# Altium PCB CommandBoard.PcbDoc
Units mm, origin at the board's own origin, x right, y up, seen from the top; angles counter-clockwise.
Board outline 71 x 45 mm, 4 copper layers (Top Layer, Int1 (GND), Int2 (PWR), Bottom Layer), stack 1.369 mm thick; 127 components, 144 nets, 602 pads, 49 vias.
Unrouted connection lines stored in the file: 401.
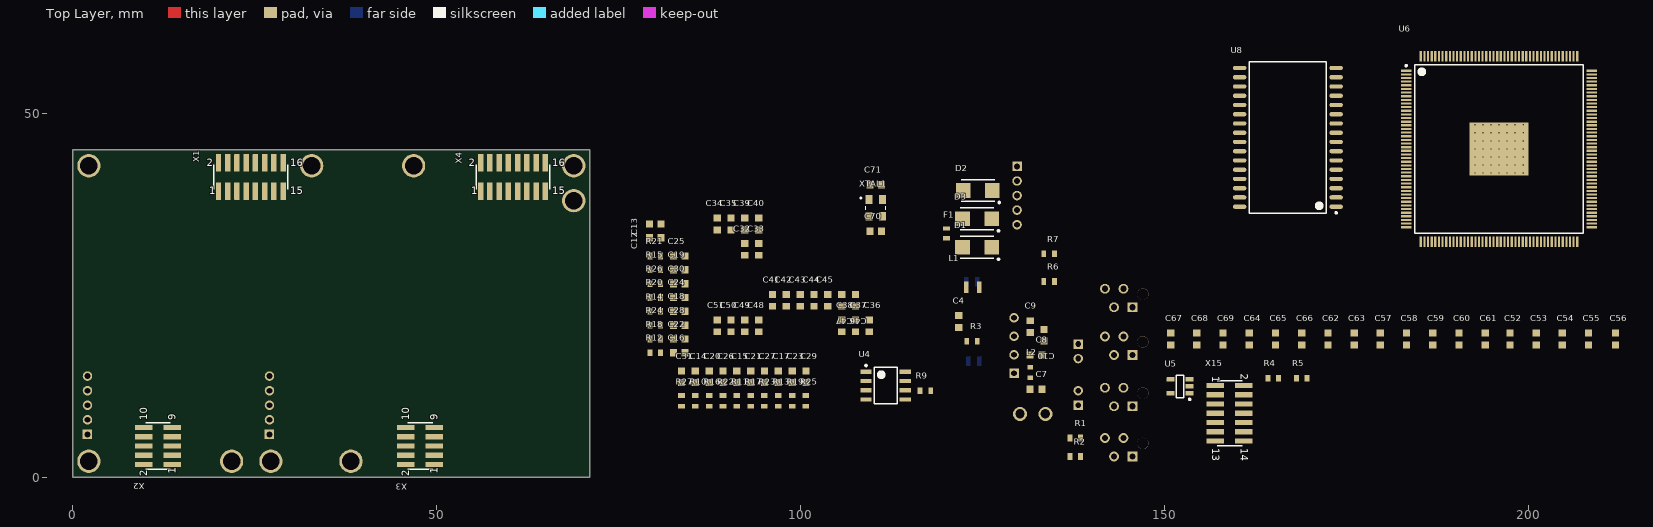
[diagram p0: Top Layer view]
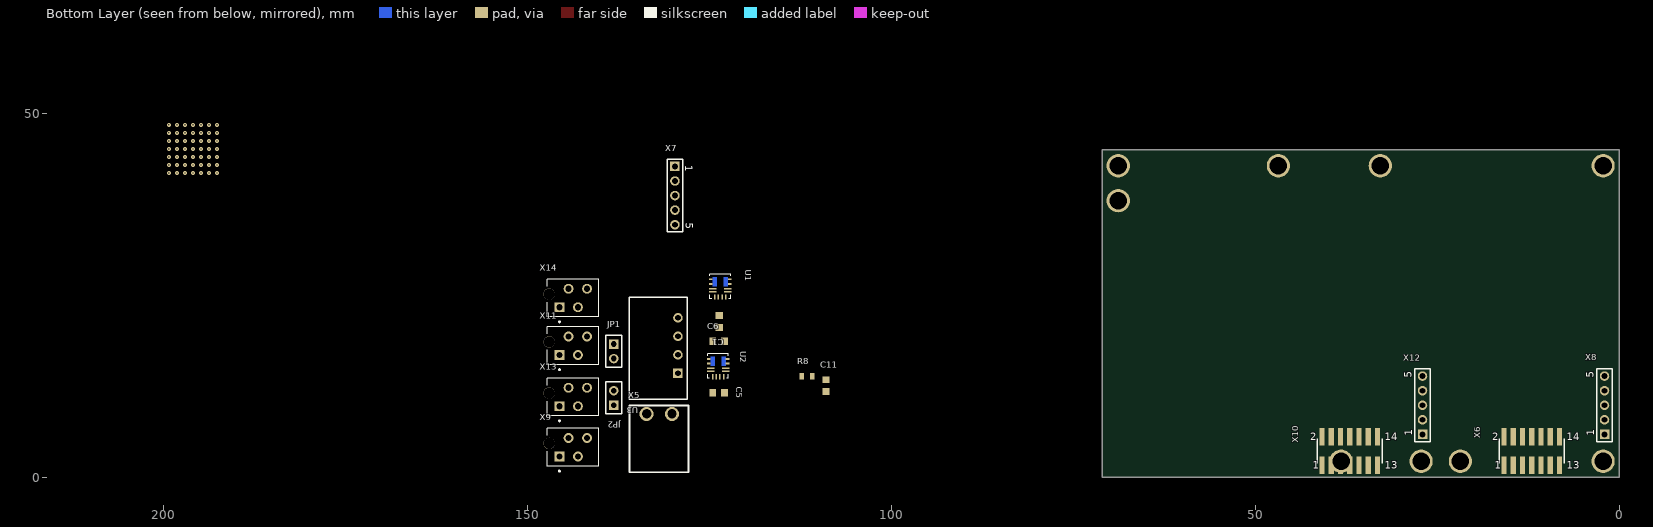
[diagram p1: Bottom Layer view, seen from below]
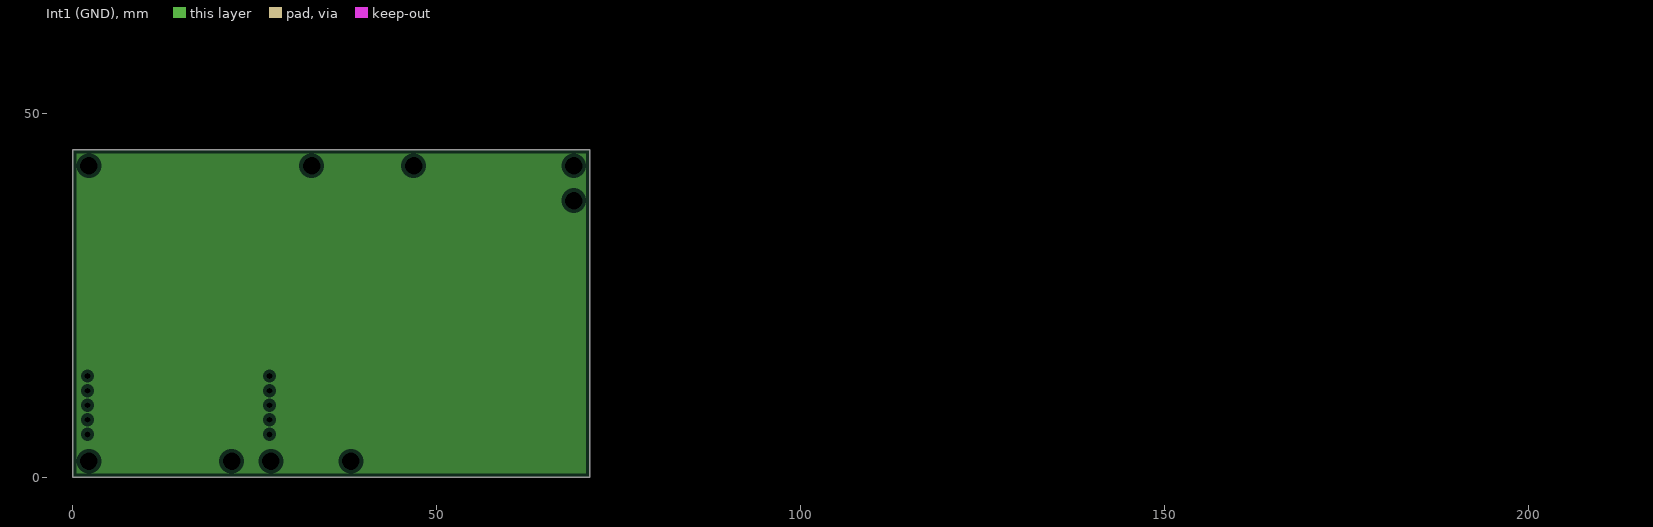
[diagram p2: Int1 (GND), clearances drawn from the general rule]
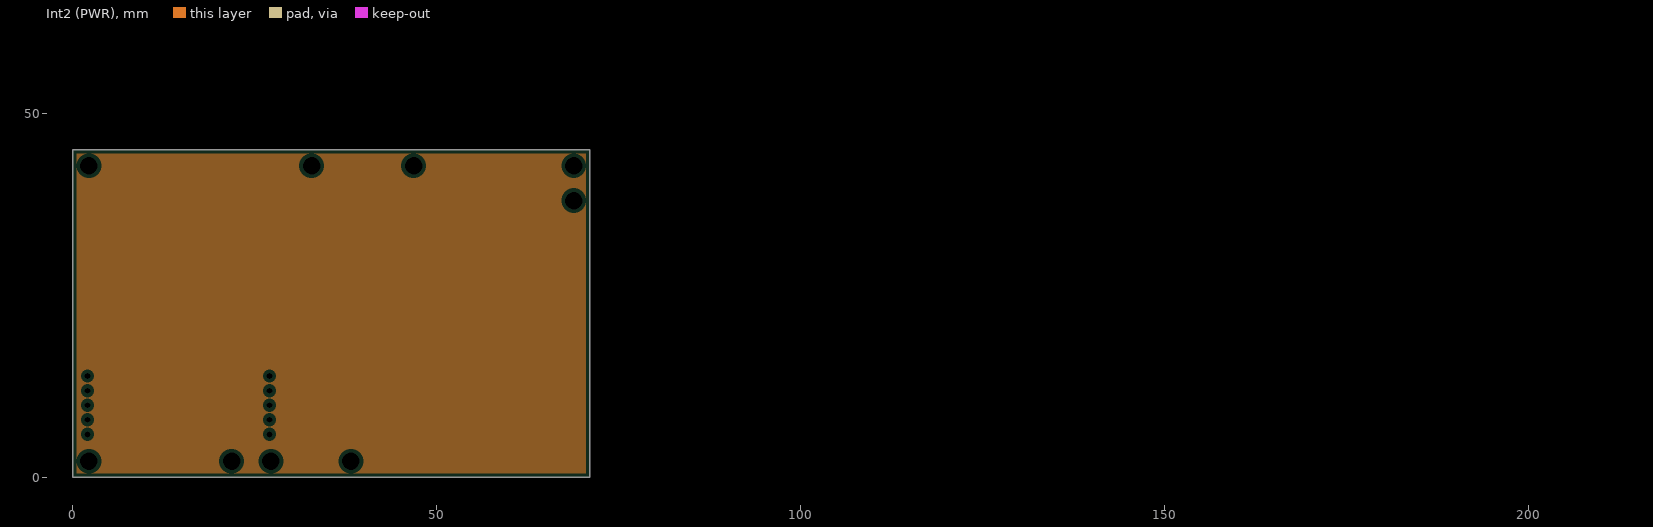
[diagram p3: Int2 (PWR), clearances drawn from the general rule]

## Layer stack, top to bottom
Top Solder: solder mask 0.0254, SM-001, Dk 4
Top Layer: signal copper 0.035
Dielectric 1: prepreg 0.1295, PP-017, Dk 4.3
Dielectric 2: prepreg 0.1295, PP-017, Dk 4.3
Int1 (GND): plane copper 0.035
Dielectric 3: core 0.7112, Core-039, Dk 4.8
Int2 (PWR): plane copper 0.035
Dielectric 4: prepreg 0.1295, PP-017, Dk 4.3
Dielectric 5: prepreg 0.1295, PP-017, Dk 4.3
Bottom Layer: signal copper 0.035
Bottom Solder: solder mask 0.0254, SM-001, Dk 4

## Board outline
0,0 71,0 71,45 0,45

## Design rules (kind name [scope] priority, off if disabled: settings)
Clearance [All] p1: gap=0.2 ignorepadtopadclearanceinfootprint=FALSE except(0: Arc-Hole Track-Hole SMDPad-Hole THPad-Hole Via-Hole Fill-Hole Poly-Hole Region-Hole Text-Hole)
HoleSize [All] p1: absolutevalues=TRUE maxlimit=3.5 minlimit=0.025 maxpercent=80.000 minpercent=20.000
PlaneClearance [All] p1: clearance=0.508
PlaneConnect [All] p1: planeconnectstyle=Relief reliefexpansion=0.508 reliefentries=4 reliefconductorwidth=0.254 reliefairgap=0.254
PolygonConnect [All] p1: connectstyle=Relief reliefconductorwidth=0.254 reliefentries=4 polygonreliefangle="90 Angle" airgapwidth=0.254
RoomDefinition Commandboard [InComponentClass('Commandboard')] p1: confinementstyle=ConfineIn formatcopy=TRUE lockcomponents=FALSE outline 0,0 71,0 71,45 0,45
RoomDefinition DSP [InComponentClass('DSP')] p2: confinementstyle=ConfineIn formatcopy=TRUE lockcomponents=FALSE outline 72.098,16.499 135.898,16.499 135.898,21.499 72.098,21.499
RoomDefinition Commandboard_1 [InComponentClass('CommandBoard')] p3: confinementstyle=ConfineIn formatcopy=TRUE lockcomponents=FALSE outline 0,0 71,0 71,45 0,45
RoutingCorners [All] p1: cornerstyle=45-Degree minsetback=2.5 maxsetback=2.5
RoutingVias [All] p1: holewidth=0.25 width=0.65 viastyle="Through Hole" minholewidth=0.25 minwidth=0.6 maxholewidth=1.8 maxwidth=2
SolderMaskExpansion [All] p1: expansion=0.102 istentingtop=FALSE
Width [All] p1: maxlimit=0.5 minlimit=0.15 preferedwidth=0.2
26 further rules are at their usual default settings.

## Classes and differential pairs
component class DSP: C32 C33 C34 C35 C36 C37 C38 C39 C40 C41 C42 C43 C44 C45 C46 C47 C48 C49 C50 C51 C52 C53 C54 C55 C56 C57 C58 C59 C60 C61 C62 C63 C64 C65 C66 C67 C68 C69 C70 C71 U6
component class Commandboard: C1 C4 C5 C6 C7 C8 C9 C10 C11 C12 C13 C14 C15 C16 C17 C18 C19 C20 C21 C22 C23 C24 C25 C26 C27 C28 C29 C30 C31 JP1 JP2 L1 L2 R3 R4 R5 R6 R7 R8 R9 R10 R11 R12 R13 R14 R15 R16 R17 R18 R19 R20 R21 R22 R23 R24 R25 R26 R27 U1 U2 U3 U4 U5 U8 X15 X16 X18 XTAL1

## Components (designator, comment, footprint, x,y, rotation, side; value= is the part's Value field where it differs from the comment)
C1 "CAP CER 10uF 0603" CAPC1608X08N 123.6,21.4 r90 bottom value=10uF
C4 "CAP CER 10uF 0603" CAPC1608X08N 121.7,21.4 r90 top value=10uF
C5 "CAP CER 10uF 0603" CAPC1608X08N 123.7,11.6 r0 bottom value=10uF
C6 "CAP CER 10uF 0603" CAPC1608X08N 123.7,18.7 r0 bottom value=10uF
C7 "CAP CER 4.7uF 0603" CAPC1608X08N 132.3,12.1 r180 top value=4,7uF
C8 "CAP CER 4.7uF 0603" CAPC1608X08N 132.3,16.8 r180 top value=4,7uF
C9 "CAP CER 1uF 0603" CAPC1608X08N 131.5,20.7 r90 top value=1uF
C10 "CAP CER 1nF 0603" CAPC1608X08N 133.4,19.5 r90 top value=1nF
C11 "CAP CER 100nF 0603" CAPC1608X08N 108.95,12.6 r270 bottom value=100nF
C12 "CAP CER 1nF 0603" CAPC1608X08N 80,32.9 r0 top value=24pF
C13 "CAP CER 1nF 0603" CAPC1608X08N 80,34.8 r0 top value=24pF
C14 "CAP CER 4.7nF 0603" CAPC1608X08N 85.5,13.8 r270 top value=4,7nF
C15 "CAP CER 4.7nF 0603" CAPC1608X08N 91.2,13.8 r270 top value=4,7nF
C16 "CAP CER 4.7nF 0603" CAPC1608X08N 83.3,17.1 r180 top value=4,7nF
C17 "CAP CER 4.7nF 0603" CAPC1608X08N 96.9,13.8 r270 top value=4,7nF
C18 "CAP CER 4.7nF 0603" CAPC1608X08N 83.3,22.8 r180 top value=4,7nF
C19 "CAP CER 4.7nF 0603" CAPC1608X08N 83.3,28.5 r180 top value=4,7nF
C20 "CAP CER 4.7nF 0603" CAPC1608X08N 87.4,13.8 r270 top value=4,7nF
C21 "CAP CER 4.7nF 0603" CAPC1608X08N 93.1,13.8 r270 top value=4,7nF
C22 "CAP CER 4.7nF 0603" CAPC1608X08N 83.3,19 r180 top value=4,7nF
C23 "CAP CER 4.7nF 0603" CAPC1608X08N 98.8,13.8 r270 top value=4,7nF
C24 "CAP CER 4.7nF 0603" CAPC1608X08N 83.3,24.7 r180 top value=4,7nF
C25 "CAP CER 4.7nF 0603" CAPC1608X08N 83.3,30.4 r180 top value=4,7nF
C26 "CAP CER 4.7nF 0603" CAPC1608X08N 89.3,13.8 r270 top value=4,7nF
C27 "CAP CER 4.7nF 0603" CAPC1608X08N 95,13.8 r270 top value=4,7nF
C28 "CAP CER 4.7nF 0603" CAPC1608X08N 83.3,20.9 r180 top value=4,7nF
C29 "CAP CER 4.7nF 0603" CAPC1608X08N 100.7,13.8 r270 top value=4,7nF
C30 "CAP CER 4.7nF 0603" CAPC1608X08N 83.3,26.6 r180 top value=4,7nF
C31 "CAP CER 4.7nF 0603" CAPC1608X08N 83.6,13.8 r270 top value=4,7nF
C32 "CAP CER 22uF 0603" CAPC1608X08N 92.3,31.3 r270 top value=22uF
C33 "CAP CER 22uF 0603" CAPC1608X08N 94.2,31.3 r270 top value=22uF
C34 "CAP CER 22uF 0603" CAPC1608X08N 88.5,34.8 r270 top value=22uF
C35 "CAP CER 22uF 0603" CAPC1608X08N 90.4,34.8 r270 top value=22uF
C36 "CAP CER 22uF 0603" CAPC1608X08N 109.4,20.8 r270 top value=22uF
C37 "CAP CER 100nF 0603" CAPC1608X08N 107.5,20.8 r270 top value=100nF
C38 "CAP CER 100nF 0603" CAPC1608X08N 105.6,20.8 r270 top value=100nF
C39 "CAP CER 100nF 0603" CAPC1608X08N 92.3,34.8 r270 top value=100nF
C40 "CAP CER 100nF 0603" CAPC1608X08N 94.2,34.8 r270 top value=100nF
C41 "CAP CER 100nF 0603" CAPC1608X08N 96.1,24.3 r270 top value=100nF
C42 "CAP CER 100nF 0603" CAPC1608X08N 98,24.3 r270 top value=100nF
C43 "CAP CER 22uF 0603" CAPC1608X08N 99.9,24.3 r270 top value=22uF
C44 "CAP CER 22uF 0603" CAPC1608X08N 101.8,24.3 r270 top value=22uF
C45 "CAP CER 22uF 0603" CAPC1608X08N 103.7,24.3 r270 top value=22uF
C46 "CAP CER 22uF 0603" CAPC1608X08N 107.5,24.3 r90 top value=22uF
C47 "CAP CER 22uF 0603" CAPC1608X08N 105.6,24.3 r90 top value=22uF
C48 "CAP CER 22uF 0603" CAPC1608X08N 94.2,20.8 r270 top value=22uF
C49 "CAP CER 22uF 0603" CAPC1608X08N 92.3,20.8 r270 top value=22uF
C50 "CAP CER 22uF 0603" CAPC1608X08N 90.4,20.8 r270 top value=22uF
C51 "CAP CER 22uF 0603" CAPC1608X08N 88.5,20.8 r270 top value=22uF
C52 "CAP CER 100nF 0603" CAPC1608X08N 197.398,18.999 r270 top value=100nF
C53 "CAP CER 100nF 0603" CAPC1608X08N 200.998,18.999 r270 top value=100nF
C54 "CAP CER 100nF 0603" CAPC1608X08N 204.598,18.999 r270 top value=100nF
C55 "CAP CER 100nF 0603" CAPC1608X08N 208.198,18.999 r270 top value=100nF
C56 "CAP CER 100nF 0603" CAPC1608X08N 211.898,18.999 r270 top value=100nF
C57 "CAP CER 100nF 0603" CAPC1608X08N 179.598,18.999 r270 top value=100nF
C58 "CAP CER 100nF 0603" CAPC1608X08N 183.198,18.999 r270 top value=100nF
C59 "CAP CER 100nF 0603" CAPC1608X08N 186.798,18.999 r270 top value=100nF
C60 "CAP CER 100nF 0603" CAPC1608X08N 190.398,18.999 r270 top value=100nF
C61 "CAP CER 100nF 0603" CAPC1608X08N 193.998,18.999 r270 top value=100nF
C62 "CAP CER 22uF 0603" CAPC1608X08N 172.398,18.999 r270 top value=22uF
C63 "CAP CER 22uF 0603" CAPC1608X08N 175.998,18.999 r270 top value=22uF
C64 "CAP CER 100nF 0603" CAPC1608X08N 161.598,18.999 r270 top value=100nF
C65 "CAP CER 100nF 0603" CAPC1608X08N 165.198,18.999 r270 top value=100nF
C66 "CAP CER 100nF 0603" CAPC1608X08N 168.798,18.999 r270 top value=100nF
C67 "CAP CER 100nF 0603" CAPC1608X08N 150.798,18.999 r270 top value=100nF
C68 "CAP CER 100nF 0603" CAPC1608X08N 154.398,18.999 r270 top value=100nF
C69 "CAP CER 100nF 0603" CAPC1608X08N 157.998,18.999 r270 top value=100nF
C70 "CAP CER 100nF 0603" CAPC1608X08N 110.301,33.798 r0 top value=100nF
C71 "CAP CER 100nF 0603" CAPC1608X08N 110.3,40.2 r0 top value=100nF
D1 "DIODE SCHOTTKY 10V 2A SMA" DIOM4326X22N 124.2,31.6 r180 top value=MBRA210LT3G
D2 "DIODE SCHOTTKY 10V 2A SMA" DIOM4326X22N 124.298,39.4 r180 top value=MBRA210LT3G
D3 "DIODE ZENER 6.8V 1W SMA" DIOM4326X22N 124.202,35.5 r180 top value=SMAZ6V8-13-F
F1 "FUSE 1.5A 5V FAST 0603 SMD" FUSEC1508X06N 120,33.5 r270 top value=04000026NR
JP1 "CONNECT 2pos 90°" 62000211121 138.1,17.3 r270 bottom value=WR-TBL322
JP2 "CONNECT 2pos 90°" 62000211121 138.1,10.9 r90 bottom value=WR-TBL322
L1 "IND SMD 470nH 0806" INDC2016X10N 123.6,26.1 r0 top value=470nH
L2 "IND SMD 0603" INDC1608X10N 131.5,14.4 r90 top value=6,8uH
R1 "RES SMD 2K2 0603" RESC1508X04N 137.7,5.4 r180 top value=2k2
R2 "RES SMD 2K2 0603" RESC1508X04N 137.7,2.86 r180 top value=2k2
R3 "RES SMD 0R 0603" RESC1508X04N 123.5,18.7 r0 top value=0R
R4 "RES SMD 100R 0603" RESC1508X04N 164.898,13.599 r180 top value=100R
R5 "RES SMD 4.7k 0603" RESC1508X04N 168.798,13.599 r180 top value=4k7
R6 "RES SMD 4.7k 0603" RESC1508X04N 134.1,26.9 r180 top value=4k7
R7 "RES SMD 2K2 0603" RESC1508X04N 134.1,30.7 r180 top value=2k2
R8 "RES SMD 10R 0603" RESC1508X04N 111.55,13.89 r0 bottom value=10R
R9 "RES SMD 120R 0603" RESC1508X04N 117.1,11.9 r0 top value=120R
R10 "RES 10K SMD 0603" RESC1508X04N 85.5,10.5 r90 top value=10k
R11 "RES 10K SMD 0603" RESC1508X04N 91.2,10.5 r90 top value=10k
R12 "RES 10K SMD 0603" RESC1508X04N 80,17.1 r0 top value=10k
R13 "RES 10K SMD 0603" RESC1508X04N 96.9,10.5 r90 top value=10k
R14 "RES 10K SMD 0603" RESC1508X04N 80,22.8 r0 top value=10k
R15 "RES 10K SMD 0603" RESC1508X04N 80,28.5 r0 top value=10k
R16 "RES 10K SMD 0603" RESC1508X04N 87.4,10.5 r90 top value=10k
R17 "RES 10K SMD 0603" RESC1508X04N 93.1,10.5 r90 top value=10k
R18 "RES 10K SMD 0603" RESC1508X04N 80,19 r0 top value=10k
R19 "RES 10K SMD 0603" RESC1508X04N 98.8,10.5 r90 top value=10k
R20 "RES 10K SMD 0603" RESC1508X04N 80,24.7 r0 top value=10k
R21 "RES 10K SMD 0603" RESC1508X04N 80,30.4 r0 top value=10k
R22 "RES 10K SMD 0603" RESC1508X04N 89.3,10.5 r90 top value=10k
R23 "RES 10K SMD 0603" RESC1508X04N 95,10.5 r90 top value=10k
R24 "RES 10K SMD 0603" RESC1508X04N 80,20.9 r0 top value=10k
R25 "RES 10K SMD 0603" RESC1508X04N 100.7,10.5 r90 top value=10k
R26 "RES 10K SMD 0603" RESC1508X04N 80,26.6 r0 top value=10k
R27 "RES 10K SMD 0603" RESC1508X04N 83.6,10.5 r90 top value=10k
U1 "DC DC CONVERTER 5V-3.3V" QFN2p5x3p0x0p9_MNP 123.475,26.2 r0 bottom value=MPM3805GQB-33-Z
U2 "DC DC CONVERTER 5V-1.2V" QFN2p5x3p0x0p9_MNP 123.765,15.267 r0 bottom value=MPM3805GQB-12-Z
U3 "DC DC CONVERTER 5V-12V" "DCDC CONVERTER" 132,18 r90 bottom value=MEE3S0512SC
U4 "IC TRANSCEIVER CAN" SOIC127P600X175-8N 111.65,12.6 r0 top value=SN65HVD231QDRQ1
U5 "SUPERVISOR 1 CHANNEL" SOT95P280X145-5N 152.098,12.499 r180 top value=ADM823TYRJZ-R7
U6 "DSP TMS320F28388D" TSQFP50P2600X2600X160_HS-177N 195.9,45.1 r0 top value=TMS320F28388D
U8 "RAM SPI" SOP127P1410X300-32N 166.9,46.7 r180 top value=AS6C4008-55INTR
X1 "CONNECT SMD 16pos 180°" 62101621021 24.445,41.25 r0 top locked
X2 "CONNECT SMD 10pos 180°" 62101021021 11.7,4.3 r90 top locked
X3 "CONNECT SMD 10pos 180°" 62101021021 47.7,4.3 r90 top locked
X4 "CONNECT SMD 16pos 180°" 62101621021 60.455,41.25 r0 top locked
X5 "CONNECT 2pos 90°" "WR-TBL322 3.81mm 2p" 130.1,8.7 r180 bottom value=WR-TBL322
X6 "CONNECT SMD 16pos 180°" 62101421021 12,3.6 r180 bottom
X7 "CONNECT SMD 5pos 180°" 62000611121 129.7,37.7 r270 bottom
X8 "CONNECT SMD 5pos 180°" 62000611121 2,10.9 r90 bottom
X9 "CONNECT SMD 4pos 180°" TE_7-215079-4 145.57,2.86 r0 bottom
X10 "CONNECT SMD 16pos 180°" 62101421021 37,3.6 r180 bottom
X11 "CONNECT SMD 4pos 180°" TE_7-215079-4 145.57,16.8 r0 bottom
X12 "CONNECT SMD 5pos 180°" 62000611121 27,10.9 r90 bottom
X13 "CONNECT SMD 4pos 180°" TE_7-215079-4 145.57,9.76 r0 bottom
X14 "CONNECT SMD 4pos 180°" TE_7-215079-4 145.57,23.36 r0 bottom
X15 "CONNECT SMD 7x2pos 180°" 62101421021 158.898,8.799 r270 top
XTAL1 "CRYSTAL 12.0000MHZ" OSCCC320X250X60N 110.3,37 r0 top value=CX3225SB12000

## Footprints (in the part's own frame and the unit in brackets; to place one, negate y for a bottom-side part, rotate by r counter-clockwise, add the part's x,y. Pads: shape width x height; smd on the part's side, far side on the other; paste and mask are expansions set on the pad)
62000211121 [mm] "Pin Header, pitch 2.00 mm, THT, Vertical, single row, 2p"
  rect 1.3x1.3 hole 0.8: 1(-1,0)
  round 1.3 hole 0.8: 2(1,0)
  silkscreen extent -2.2,-1.07 2.2,1.07, body extent -2,-1 2,1, height 6.05
62000611121 [mm] "Pin Header, pitch 2.00 mm, THT, Vertical, single row, 6p"
  rect 1.3x1.3 hole 0.8: 1(-5,0)
  round 1.3 hole 0.8: 2(-3,0) 3(-1,0) 4(1,0) 5(3,0)
  silkscreen extent -6,-1.07 4,1.07, body extent -5.97,-1 4,1, height 6
62101021021 [mm] "Pin Header, pitch 1.27 mm, SMD, Vertical, dual row, 10p"
  rrect10% 0.75x2.4 smd: 1(-2.54,-1.95) 2(-2.54,1.95) 3(-1.27,-1.95) 4(-1.27,1.95) 5(0,-1.95) 6(0,1.95) 7(1.27,-1.95) 8(1.27,1.95) 9(2.54,-1.95) 10(2.54,1.95)
  silkscreen extent -3.17,-1.7 3.17,1.7, body extent -3.17,-2.5 3.18,2.5, height 5.9
62101421021 [mm] "Pin Header, pitch 1.27 mm, SMD, Vertical, dual row, 14p"
  rrect10% 0.75x2.4 smd: 1(-3.81,-1.95) 2(-3.81,1.95) 3(-2.54,-1.95) 4(-2.54,1.95) 5(-1.27,-1.95) 6(-1.27,1.95) 7(0,-1.95) 8(0,1.95) 9(1.27,-1.95) 10(1.27,1.95) 11(2.54,-1.95) 12(2.54,1.95) 13(3.81,-1.95) 14(3.81,1.95)
  silkscreen extent -4.44,-1.7 4.44,1.7, body extent -4.44,-2.5 4.45,2.5, height 5.9
62101621021 [mm] "Pin Header, pitch 1.27 mm, SMD, Vertical, dual row, 16p"
  rrect10% 0.75x2.4 smd: 1(-4.445,-1.95) 2(-4.445,1.95) 3(-3.175,-1.95) 4(-3.175,1.95) 5(-1.905,-1.95) 6(-1.905,1.95) 7(-0.635,-1.95) 8(-0.635,1.95) 9(0.635,-1.95) 10(0.635,1.95) 11(1.905,-1.95) 12(1.905,1.95) 13(3.175,-1.95) 14(3.175,1.95) 15(4.445,-1.95) 16(4.445,1.95)
  silkscreen extent -5.08,-1.7 5.08,1.7, body extent -5.08,-2.5 5.08,2.5, height 5.9
CAPC1608X08N [mm] "Chip Capacitor, 2-Leads, Body 1.60x0.80mm, IPC Medium Density"
  rect 0.95x1 smd: 1(-0.8,0) 2(0.8,0)
  body extent -0.88,-0.48 0.87,0.47, height 0.8
"DCDC CONVERTER" [mm]
  rect 1.3x1.3 hole 0.8: 1(-3.71,-2.71)
  round 1.3 hole 0.8: 2(-1.17,-2.71) 3(1.37,-2.71) 4(3.91,-2.71)
  silkscreen extent -7.25,-4 6.75,4, body extent -7.25,-4.02 6.75,4, height 10.05
DIOM4326X22N [mm] "Molded Diode, 2-Leads, Body 4.31x2.61mm, IPC Medium Density"
  rect 2x2 smd: 1(-2,0) 2(2,0)
  silkscreen extent -3.08,-1.5 2.3,1.77, body extent -2.5,-1.46 2.5,1.46, height 2.2
FUSEC1508X06N [mm] "Chip Resistor, 2-Leads, Body 1.55x0.85mm, IPC Medium Density"
  rect 0.6x1 smd: 1(-0.67,0) 2(0.67,0)
  body extent -0.85,-0.5 0.85,0.5, height 0.58
INDC1608X10N [mm] "Chip Inductor, 2-Leads, Body 1.60x0.80mm, IPC Medium Density"
  rect 0.6x0.8 smd: 1(-0.7,0) 2(0.7,0)
  body extent -0.87,-0.47 0.88,0.48, height 0.95
INDC2016X10N [mm] "Chip Inductor, 2-Leads, Body 2.00x1.60mm, IPC Medium Density"
  rect 0.6x1.6 smd: 1(-0.9,0) 2(0.9,0)
  body extent -1.1,-0.9 1.1,0.9, height 1
OSCCC320X250X60N [mm]
  rect 0.97x1.22 smd: 1(-0.92,1.145) 2(-0.92,-1.145) 3(0.92,-1.145) 4(0.92,1.145)
  silkscreen extent -2.17,-0.22 1.36,1.46
QFN2p5x3p0x0p9_MNP [mil]
  rect 41x8 smd paste+0 mask+0: 1(-40.35,27.57) 2(-40.35,11.81) 7(40.35,11.81) 8(40.35,27.57)
  rect 20x10 smd paste+0 mask+0: 3(-50.87,-13.78) 4(-50.87,-39.38) 5(50.87,-39.38) 6(50.87,-13.78)
  rect 8x28 smd paste+0 mask+0: 9(29.53,57.09) 10(9.85,57.09) 11(-9.85,57.09) 12(-29.54,57.09)
  Top Layer region: 19.21,-50.2 19.21,-2.96 40.87,-2.96 40.87,-50.2
  Top Layer region: -40.87,-50.2 -40.87,-2.96 -19.21,-2.96 -19.21,-50.2
  silkscreen extent -56,-66 56,66, body extent 0,0 10,10, height 10
RESC1508X04N [mm] "Chip Resistor, 2-Leads, Body 1.55x0.80mm, IPC Medium Density"
  rect 0.65x0.9 smd: 1(-0.725,0) 2(0.725,0)
  body extent -0.85,-0.48 0.85,0.47, height 0.45
SOIC127P600X175-8N [mm] "SOIC, 8-Leads, Body 4.91x3.90mm, Pitch 1.27mm, IPC Medium Density"
  rrect10% 1.55x0.6 smd: 1(-2.7,1.905) 2(-2.7,0.635) 3(-2.7,-0.635) 4(-2.7,-1.905) 5(2.7,-1.905) 6(2.7,-0.635) 7(2.7,0.635) 8(2.7,1.905)
  silkscreen extent -2.82,-2.5 1.6,2.88, body extent -3,-2.5 3,2.5, height 1.75
SOP127P1410X300-32N [mm] "SOP, 32-Leads, Body 20.68x11.30mm, Pitch 1.27mm, IPC Medium Density"
  oval 1.85x0.6 smd: 1(-6.625,9.525) 2(-6.625,8.255) 3(-6.625,6.985) 4(-6.625,5.715) 5(-6.625,4.445) 6(-6.625,3.175) 7(-6.625,1.905) 8(-6.625,0.635) 9(-6.625,-0.635) 10(-6.625,-1.905) 11(-6.625,-3.175) 12(-6.625,-4.445) 13(-6.625,-5.715) 14(-6.625,-6.985) 15(-6.625,-8.255) 16(-6.625,-9.525) 17(6.625,-9.525) 18(6.625,-8.255) 19(6.625,-6.985) 20(6.625,-5.715) 21(6.625,-4.445) 22(6.625,-3.175) 23(6.625,-1.905) 24(6.625,-0.635) 25(6.625,0.635) 26(6.625,1.905) 27(6.625,3.175) 28(6.625,4.445) 29(6.625,5.715) 30(6.625,6.985) 31(6.625,8.255) 32(6.625,9.525)
  silkscreen extent -6.75,-10.4 5.3,10.5, body extent -7.05,-10.4 7.05,10.4, height 3
SOT95P280X145-5N [mm] "SOT23, 5-Leads, Body 2.90x2.80mm, Pitch 0.95mm, IPC Medium Density"
  rrect10% 1.1x0.6 smd: 1(-1.3,0.95) 2(-1.3,0) 3(-1.3,-0.95) 4(1.3,-0.95) 5(1.3,0.95)
  silkscreen extent -1.43,-1.55 0.5,1.92, body extent -1.5,-1.53 1.5,1.53, height 1.45
TE_7-215079-4 [mm]
  rect 1.358x1.358 hole 0.85: 1(0,0)
  round 1.358 hole 0.85: 2(-1.27,-2.54) 3(-2.54,0) 4(-3.81,-2.54)
  round 1.55 hole 1.55 unplated: ""(1.4,-1.8)
  silkscreen extent -5.43,-3.87 1.65,2.11, body extent -5.39,-3.77 1.65,1.23, height 4.1
TSQFP50P2600X2600X160_HS-177N [mm] "TSQFP, 176-Leads, Body 24.00x24.00mm, Pitch 0.50mm, Thermal Pad 8.07x7.33mm, IPC Medium Density"
  rrect10% 1.45x0.3 smd: 1(-12.75,10.75) 2(-12.75,10.25) 3(-12.75,9.75) 4(-12.75,9.25) 5(-12.75,8.75) 6(-12.75,8.25) 7(-12.75,7.75) 8(-12.75,7.25) 9(-12.75,6.75) 10(-12.75,6.25) 11(-12.75,5.75) 12(-12.75,5.25) 13(-12.75,4.75) 14(-12.75,4.25) 15(-12.75,3.75) 16(-12.75,3.25) 17(-12.75,2.75) 18(-12.75,2.25) 19(-12.75,1.75) 20(-12.75,1.25) 21(-12.75,0.75) 22(-12.75,0.25) 23(-12.75,-0.25) 24(-12.75,-0.75) 25(-12.75,-1.25) 26(-12.75,-1.75) 27(-12.75,-2.25) 28(-12.75,-2.75) 29(-12.75,-3.25) 30(-12.75,-3.75) 31(-12.75,-4.25) 32(-12.75,-4.75) 33(-12.75,-5.25) 34(-12.75,-5.75) 35(-12.75,-6.25) 36(-12.75,-6.75) 37(-12.75,-7.25) 38(-12.75,-7.75) 39(-12.75,-8.25) 40(-12.75,-8.75) 41(-12.75,-9.25) 42(-12.75,-9.75) 43(-12.75,-10.25) 44(-12.75,-10.75) 89(12.75,-10.75) 90(12.75,-10.25) 91(12.75,-9.75) 92(12.75,-9.25) 93(12.75,-8.75) 94(12.75,-8.25) 95(12.75,-7.75) 96(12.75,-7.25) 97(12.75,-6.75) 98(12.75,-6.25) 99(12.75,-5.75) 100(12.75,-5.25) 101(12.75,-4.75) 102(12.75,-4.25) 103(12.75,-3.75) 104(12.75,-3.25) 105(12.75,-2.75) 106(12.75,-2.25) 107(12.75,-1.75) 108(12.75,-1.25) 109(12.75,-0.75) 110(12.75,-0.25) 111(12.75,0.25) 112(12.75,0.75) 113(12.75,1.25) 114(12.75,1.75) 115(12.75,2.25) 116(12.75,2.75) 117(12.75,3.25) 118(12.75,3.75) 119(12.75,4.25) 120(12.75,4.75) 121(12.75,5.25) 122(12.75,5.75) 123(12.75,6.25) 124(12.75,6.75) 125(12.75,7.25) 126(12.75,7.75) 127(12.75,8.25) 128(12.75,8.75) 129(12.75,9.25) 130(12.75,9.75) 131(12.75,10.25) 132(12.75,10.75)
  rrect10% 0.3x1.45 smd: 45(-10.75,-12.75) 46(-10.25,-12.75) 47(-9.75,-12.75) 48(-9.25,-12.75) 49(-8.75,-12.75) 50(-8.25,-12.75) 51(-7.75,-12.75) 52(-7.25,-12.75) 53(-6.75,-12.75) 54(-6.25,-12.75) 55(-5.75,-12.75) 56(-5.25,-12.75) 57(-4.75,-12.75) 58(-4.25,-12.75) 59(-3.75,-12.75) 60(-3.25,-12.75) 61(-2.75,-12.75) 62(-2.25,-12.75) 63(-1.75,-12.75) 64(-1.25,-12.75) 65(-0.75,-12.75) 66(-0.25,-12.75) 67(0.25,-12.75) 68(0.75,-12.75) 69(1.25,-12.75) 70(1.75,-12.75) 71(2.25,-12.75) 72(2.75,-12.75) 73(3.25,-12.75) 74(3.75,-12.75) 75(4.25,-12.75) 76(4.75,-12.75) 77(5.25,-12.75) 78(5.75,-12.75) 79(6.25,-12.75) 80(6.75,-12.75) 81(7.25,-12.75) 82(7.75,-12.75) 83(8.25,-12.75) 84(8.75,-12.75) 85(9.25,-12.75) 86(9.75,-12.75) 87(10.25,-12.75) 88(10.75,-12.75) 133(10.75,12.75) 134(10.25,12.75) 135(9.75,12.75) 136(9.25,12.75) 137(8.75,12.75) 138(8.25,12.75) 139(7.75,12.75) 140(7.25,12.75) 141(6.75,12.75) 142(6.25,12.75) 143(5.75,12.75) 144(5.25,12.75) 145(4.75,12.75) 146(4.25,12.75) 147(3.75,12.75) 148(3.25,12.75) 149(2.75,12.75) 150(2.25,12.75) 151(1.75,12.75) 152(1.25,12.75) 153(0.75,12.75) 154(0.25,12.75) 155(-0.25,12.75) 156(-0.75,12.75) 157(-1.25,12.75) 158(-1.75,12.75) 159(-2.25,12.75) 160(-2.75,12.75) 161(-3.25,12.75) 162(-3.75,12.75) 163(-4.25,12.75) 164(-4.75,12.75) 165(-5.25,12.75) 166(-5.75,12.75) 167(-6.25,12.75) 168(-6.75,12.75) 169(-7.25,12.75) 170(-7.75,12.75) 171(-8.25,12.75) 172(-8.75,12.75) 173(-9.25,12.75) 174(-9.75,12.75) 175(-10.25,12.75) 176(-10.75,12.75)
  rect 8.07x7.33 smd: 177(0,0)
  silkscreen extent -12.87,-11.6 11.6,11.6, body extent -13,-13 13,13, height 1.6
"WR-TBL322 3.81mm 2p" [mm]
  round 1.95 hole 1.3: 1(-3.5,0) 2(0,0)
  silkscreen extent -5.84,-8 2.29,1.14, body extent -5.83,-8.03 2.27,1.17, height 7.25

## Part data
C1 C4 C5 C6: library part "CAP CER 10uF 10% 10V 0603", "10µF ±20% 10V Condensateurs céramique X5R 0603 (1608 métrique)", Supplier Part Number 1=399-14945-1-ND, Supplier 1=Digi-Key
C7 C8: library part "CAP CER 4.7uF 10% 10V 0603", "4,7µF ±20% 10V Condensateurs céramique X5R 0603 (1608 métrique)", Supplier Part Number 1=399-9100-1-ND, Supplier 1=Digi-Key
C9: library part "CAP CER 1uF 10% 16V 0603", "1µF ±10% 16V Condensateurs céramique X7R 0603 (1608 métrique)", Supplier Part Number 1=399-7847-1-ND, Supplier 1=Digi-Key
C10: library part "CAP CER 1nF 10% 10V 0603", "1nF ±10% 10V Condensateurs céramique X7R 0603 (1608 métrique)", Supplier Part Number 1=399-8984-1-ND, Supplier 1=Digi-Key
C11 C37 C38 C39 C40 C41 C42 C52 C53 C54 C55 C56 C57 C58 C59 C60 C61 C64 C65 C66 C67 C68 C69 C70 C71: library part "CAP CER 100nF 10% 10V 0603", "0,1µF ±10% 10V Condensateurs céramique X7R 0603 (1608 métrique)", Supplier Part Number 1=399-1095-1-ND, Supplier 1=Digi-Key
C12 C13: library part "CAP CER 24pF 10% 10V 0603", "24pF ±10% 10V Condensateurs céramique X7R 0603 (1608 métrique)", Supplier Part Number 1=399-8984-1-ND, Supplier 1=Digi-Key
C14 C15 C16 C17 C18 C19 C20 C21 C22 C23 C24 C25 C26 C27 C28 C29 C30 C31: library part "CAP CER 4.7nF 10% 10V 0603", "4,7nF ±10% 10V Condensateurs céramique X7R 0603 (1608 métrique)", Supplier Part Number 1=399-9092-1-ND, Supplier 1=Digi-Key
C32 C33 C34 C35 C36 C43 C44 C45 C46 C47 C48 C49 C50 C51 C62 C63: library part "CAP CER 22uF 20% 6V3 0603", "22µF ±20% 6,3V Condensateurs céramique X5R 0603 (1608 métrique)", Supplier Part Number 1=399-14498-1-ND, Supplier 1=Digi-Key
D1 D2: "Diode Schottky 10V 2A Montage en surface SMA", Supplier Part Number 1=MBRA210LT3GOSCT-ND, ComponentLink1Description="Manufacturer Link", ComponentLink1URL=http://www.infineon.com/, ComponentLink2Description=Datasheet, ComponentLink2URL=http://www.infineon.com/upload/Document/cmc_upload/documents/009/363/bat17series.pdf, Supplier 1=Digi-Key
D3: "Diodes - Zener 6,8V 1W ±5% Montage en surface SMA", Supplier Part Number 1=SMAZ6V8-FDICT-ND, Supplier 1=Digi-Key
F1: "1,5A CA 5V Fusible CC Montage sur carte (type cartouche exclu) Montage en surface 0603 (1608 métrique)", Supplier Part Number 1=F12132CT-ND, Supplier 1=Digi-Key
JP1 JP2: library part "CONNECT 2pos 90° 3.81mm", "2 Positions, bloc de jonction Embase, broche mâle, gainée (4 côtés) 0,150 po (3,81mm) 90°, engle droit Trou traversant", Supplier Part Number 1=732-2088-ND, Supplier 1=Digi-Key
  JP1: Use="CAN Resistor"
  JP2: Use=Reset
L2: library part "IND SMD 6.8uH 0603", "6,8µH Blindé Multicouche Inducteur 15mA 1,3Ohms maxi 0603 (1608 métrique)", Supplier Part Number 1=445-173923-1-ND, Supplier 1=Digi-Key
R1 R2 R7: library part "RES SMD 2K2 OHM 1% 1/10W 0603", "2,2 kOhms ±1% 0,1W, 1/10W Pavé résistif 0603 (1608 métrique) AutomobileAEC-Q200 Couche épaisse", Supplier Part Number 1=RMCF0603FT2K20CT-ND, Supplier 1=Digi-Key
R3: library part "RES SMD 0 OHM 1% 1/10W 0603", "Resistance 0 OHM"
R4: library part "RES SMD 100 OHM 1% 1/10W 0603", "100 Ohms ±1% 0,1W, 1/10W Pavé résistif 0603 (1608 métrique) AutomobileAEC-Q200 Couche épaisse", Supplier Part Number 1=RMCF0603FT100RCT-ND, Supplier 1=Digi-Key
R5 R6: library part "RES SMD 4.7k OHM 1% 1/10W 0603", "4,7 kOhms ±1% 0,1W, 1/10W Pavé résistif 0603 (1608 métrique) AutomobileAEC-Q200 Couche épaisse", Supplier Part Number 1=RMCF0603FT4K70CT-ND, Supplier 1=Digi-Key
R8: library part "RES SMD 10 OHM 1% 1/10W 0603", "10 Ohms ±1% 0,1W, 1/10W Pavé résistif 0603 (1608 métrique) AutomobileAEC-Q200 Couche épaisse", Supplier Part Number 1=RMCF0603FT10R0CT-ND, Supplier 1=Digi-Key
R9: library part "RES SMD 120 OHM 1% 1/10W 0603", "120 Ohms ±1% 0,1W, 1/10W Pavé résistif 0603 (1608 métrique) AutomobileAEC-Q200 Couche épaisse", Supplier Part Number 1=RMCF0603FT120RCT-ND, Supplier 1=Digi-Key
R10 R11 R12 R13 R14 R15 R16 R17 R18 R19 R20 R21 R22 R23 R24 R25 R26 R27: library part "RES SMD 10K OHM 1% 1/10W 0603", "10 kOhms ±1% 0,1W, 1/10W Pavé résistif 0603 (1608 métrique) AutomobileAEC-Q200 Couche épaisse", Supplier Part Number 1=RMCF0603FT10K0CT-ND, Supplier 1=Digi-Key
U1: library part "DC DC CONVERTER 5V-3.3V 2W", "Module PoL non isolé Convertisseurs CC/CC 1 Sortie 3,3V 600mA 2,5V - 6V Entrée", Supplier Part Number 1=1589-1986-1-ND, Supplier 1=Digi-Key
U2: library part "DC DC CONVERTER 5V-1.2V 720mW", "Module PoL non isolé Convertisseurs CC/CC 1 Sortie 1,2V 600mA 2,5V - 6V Entrée", Supplier Part Number 1=1589-1983-1-ND, Supplier 1=Digi-Key
U3: library part "DC DC CONVERTER 5V-12V 3W", "Module isolé Convertisseurs CC/CC 1 Sortie 12V 250mA 4,5V - 5,5V Entrée", Supplier Part Number 1=811-2358-5-ND, Supplier 1=Digi-Key
U4: library part "IC TRANSCEIVER HALF 1/1 8SOIC", "Émetteur-récepteur 1/1 Semi CANbus 8-SOIC", Supplier Part Number 1=296-15380-1-ND, Supplier 1=Digi-Key
U5: library part "IC SUPERVISOR 1 CHANNEL SOT23-5", "Superviseur Pousser-tirer/Totem pôle 1 canal SOT-23-5", Supplier Part Number 1=ADM823TYRJZ-R7CT-ND, Supplier 1=Digi-Key
U6: "Microcontrôleurs ARM - MCU C2000 32-bit MCU w/ connectivity manager, 2x C28x+CLA CPU, 1.5-MB flash, FPU64, CLB, ENET, EtherCAT 176-HLQFP -40 to 125 °C"
U8: library part RAM, "IC RAM 8MBIT SPI 10MHZ 8SOP"
X1 X4: library part "CONNECT SMD 16pos 2row 180° 1.27mm", system=connector
  X1: Use=PowerBoard1
  X4: Use=PowerBoard2
X2 X3: library part "CONNECT SMD 10pos 180° 1.27mm", system=connector
  X2: Use="Measures PowerBoard1"
  X3: Use="Measures PowerBoard2"
X5: library part "CONNECT 2pos 90° 3.81mm F", "2 Positions, bloc de jonction Embase, broche mâle, gainée (4 côtés) 0,150 po (3,81mm) 90°, engle droit Trou traversant", Supplier Part Number 1=732-2088-ND, Supplier 1=Digi-Key, Use="External power supply 5V"
X6 X10: library part "CONNECT SMD 16pos 180° 1.27mm", system=connector
  X6: Use="Sensors InterfaceBoard1"
  X10: Use="Sensors InterfaceBoard2"
X7 X8 X12: library part "CONNECT SMD 5pos 180° 2mm", system=connector
  X7: Use="DCDC 5V"
  X8: Use="Power supply InterfaceBoard1"
  X12: Use="Power supply InterfaceBoard2"
X9 X11 X13 X14: library part "CONNECT SMD 4pos 180° 2.54mm F", "Connecteur, embase Montage en surface 4 positions 0,100 po (2,54mm)"
  X9: Use=I2C
  X11: Use=CAN
  X13: Use=UART
  X14: Use=SPI
X15: library part "CONNECT SMD 7x2pos 180° 2.54mm", Use=JTAG
XTAL1: library part "OSCILLATOR 12MHz", "CRYSTAL 12.0000MHZ 8PF SMD"

## Free pads (board coordinates)
  round 3.2 hole 2.4: 1(2.2,2.2) 1(2.2,42.8) 1(21.8,2.2) 1(27.2,2.2) 1(32.8,42.8) 1(38.2,2.2) 1(46.8,42.8) 1(68.8,38) 1(68.8,42.8)

## Via types
v1: diameter 0.5, hole 0.2, Top Layer to Bottom Layer, 49 vias

## Nets (pads, with @x,y where several pads share a name; then routed paths per layer and width w, separated by ;. In a path a pad name is that pad's centre, name@x,y a point inside that pad or via, vN(x,y) a via of type N, cw(c..) or ccw(c..) an arc to the next point about the centre after c; other vN are vias at no path point)
+1.2VD: C6.2 C32.2 C33.2 C34.2 C35.2 C36.2 C47.2 C48.2 C49.2 C50.2 C51.2 U2.5 U2.6 U2.12 U6.16 U6.21 U6.61 U6.76 U6.117 U6.126 U6.137 U6.153 U6.158 U6.169
+3.3VA: C43.2 C44.2 C45.2 C46.2 C62.2 C63.2 L1.2 U6.35 U6.36 U6.37 U6.53 U6.54 U6.55
+3.3VD: C4.2 C11.1 C37.2 C38.2 C39.2 C40.2 C41.2 C42.2 C52.2 C53.2 C54.2 C55.2 C56.2 C57.2 C58.2 C59.2 C60.2 C61.2 C64.2 C65.2 C66.2 C67.2 C68.2 C69.2 C70.2 C71.2 L1.1 R4.2 R5.2 R6.2 U1.5 U1.6 U1.12 U4.3 U5.5 U6.3 U6.11 U6.15 U6.20 U6.26 U6.62 U6.68 U6.72 U6.75 U6.82 U6.88 U6.91 U6.99 U6.106 U6.114 U6.116 U6.120 U6.125 U6.127 U6.138 U6.147 U6.152 U6.159 U6.168 U8.32 X1.4 X1.5 X4.4 X4.5 X8.2 X8.3 X12.2 X12.3
+5VD: C1.2 C5.2 C7.2 D2.2 D3.2 F1.1 L2.1 R1.2 R2.2 U1.7 U1.9 U2.7 U2.9 X8.1 X9.1 X12.1
+12V: C9.2 U3.4 X1.3 X4.3
A1: C14.2 R10.2 U6.31
A2: C20.2 R16.2 U6.30
A3: C26.2 R22.2 U6.29
A4: C15.2 R11.2 U6.56
A5: C21.2 R17.2 U6.39
A6: C27.2 R23.2 U6.38
A7: C16.2 R12.2 U6.42
A8: C22.2 R18.2 U6.41
A9: C28.2 R24.2 U6.40
A10: C17.2 R13.2 U6.57
A11: C23.2 R19.2 U6.58
A12: C29.2 R25.2 U6.59
A13: C18.2 R14.2 U6.60
A14: C24.2 R20.2 U6.44
A15: C30.2 R26.2 U6.45
A16: C19.2 R15.2 U6.47
A17: C25.2 R21.2 U6.48
A18: C31.2 R27.2 U6.49
AGND: C14.1 C15.1 C16.1 C17.1 C18.1 C19.1 C20.1 C21.1 C22.1 C23.1 C24.1 C25.1 C26.1 C27.1 C28.1 C29.1 C30.1 C31.1 C43.1 C44.1 C45.1 C46.1 C62.1 C63.1 R3.2 U1.11 U2.11 U6.32 U6.33 U6.34 U6.50 U6.51 U6.52 X1.6 X4.6
D0: U6.100 U8.13
D1: U6.151 U8.14
D2: U6.150 U8.15
D3: U6.103 U8.17
D4: U6.104 U8.18
D5: U6.105 U8.19
D6: U6.107 U8.20
D7: U6.144 U8.21
DGND: C1.1 C4.1 C5.1 C6.1 C7.1 C8.1 C10.1 C11.2 C12.1 C13.2 C32.1 C33.1 C34.1 C35.1 C36.1 C37.1 C38.1 C39.1 C40.1 C41.1 C42.1 C47.1 C48.1 C49.1 C50.1 C51.1 C52.1 C53.1 C54.1 C55.1 C56.1 C57.1 C58.1 C59.1 C60.1 C61.1 C64.1 C65.1 C66.1 C67.1 C68.1 C69.1 C70.1 C71.1 D3.1 JP2.2 R3.1 R7.1 R8.1 U1.1 U1.2 U2.1 U2.2 U3.1 U4.2 U5.2 U5.4 U6.122 U6.177 U8.16 X1.7 X4.7 X5.2 X7.5 X8.5 X9.4 X11.4 X12.5 X13.3 X15.4 X15.8 X15.10 X15.12 XTAL1.2 XTAL1.4
  other v1: 192.6,41.8 193.7,41.8 194.8,41.8 195.9,41.8 197,41.8 198.1,41.8 199.2,41.8 192.6,42.9 193.7,42.9 194.8,42.9 195.9,42.9 197,42.9 198.1,42.9 199.2,42.9 192.6,44 193.7,44 194.8,44 195.9,44 197,44 198.1,44 199.2,44 192.6,45.1 193.7,45.1 194.8,45.1 195.9,45.1 197,45.1 198.1,45.1 199.2,45.1 192.6,46.2 193.7,46.2 194.8,46.2 195.9,46.2 197,46.2 198.1,46.2 199.2,46.2 192.6,47.3 193.7,47.3 194.8,47.3 195.9,47.3 197,47.3 198.1,47.3 199.2,47.3 192.6,48.4 193.7,48.4 194.8,48.4 195.9,48.4 197,48.4 198.1,48.4 199.2,48.4
GND_12V: C9.1 C10.2 U3.3 X1.8 X4.8
NetC8_2: C8.2 L2.2 U3.2
NetD1_1: D1.1 X5.1
NetD1_2: D1.2 F1.2
NetD2_1: D2.1 X7.4
NetJP1_1: JP1.1 U4.7 X11.2
NetJP1_2: JP1.2 R9.2
NetJP2_1: JP2.1 U5.3
NetR1_1: R1.1 U6.130 X9.3
NetR2_1: R2.1 U6.131 X9.2
NetR4_1: R4.1 X15.5
NetR5_1: R5.1 X15.13
NetR6_1: R6.1 X15.14
NetR8_2: R8.2 U4.8
NetR9_1: R9.1 U4.6 X11.3
NetR10_1: R10.1 X2.1
NetR11_1: R11.1 X2.4
NetR12_1: R12.1 X6.12
NetR13_1: R13.1 X3.1
NetR14_1: R14.1 X3.4
NetR15_1: R15.1 X10.12
NetR16_1: R16.1 X2.2
NetR17_1: R17.1 X2.5
NetR18_1: R18.1 X6.13
NetR19_1: R19.1 X3.2
NetR20_1: R20.1 X3.5
NetR21_1: R21.1 X10.13
NetR22_1: R22.1 X2.3
NetR23_1: R23.1 X2.6
NetR24_1: R24.1 X6.14
NetR25_1: R25.1 X3.3
NetR26_1: R26.1 X3.6
NetR27_1: R27.1 X10.14
NetU4_1: U4.1 U6.139
NetU4_4: U4.4 U6.140
NetU4_5: U4.5 X11.1
NetU6_4: U6.4 X1.9
NetU6_5: U6.5 X1.10
NetU6_6: U6.6 X1.11
NetU6_7: U6.7 X1.12
NetU6_8: U6.8 X1.13
NetU6_9: U6.9 X1.14
NetU6_12: U6.12 X6.1
NetU6_13: U6.13 X6.2
NetU6_14: U6.14 X6.3
NetU6_22: U6.22 X2.10
NetU6_23: U6.23 X6.11
NetU6_24: U6.24 X3.10
NetU6_25: U6.25 X10.11
NetU6_63: U6.63 X2.7 X3.7
NetU6_64: U6.64 X1.15
NetU6_65: U6.65 X4.15
NetU6_66: U6.66 U8.29
NetU6_67: U6.67 U8.22
NetU6_83: U6.83 U8.11
NetU6_84: U6.84 U8.24
NetU6_85: U6.85 U8.12
NetU6_87: U6.87 U8.10
NetU6_89: U6.89 U8.9
NetU6_90: U6.90 U8.27
NetU6_93: U6.93 U8.26
NetU6_94: U6.94 U8.23
NetU6_95: U6.95 U8.25
NetU6_96: U6.96 U8.4
NetU6_97: U6.97 X14.4
NetU6_101: U6.101 X6.7
NetU6_102: U6.102 X10.7
NetU6_108: U6.108 X10.4
NetU6_109: U6.109 X10.5
NetU6_111: U6.111 X10.6
NetU6_113: U6.113 U8.8
NetU6_115: U6.115 U8.7
NetU6_128: U6.128 U8.6
NetU6_129: U6.129 U8.5
NetU6_134: U6.134 X14.1
NetU6_135: U6.135 X14.2
NetU6_136: U6.136 X14.3
NetU6_141: U6.141 X10.1
NetU6_142: U6.142 X10.2
NetU6_143: U6.143 X10.3
NetU6_145: U6.145 X6.4
NetU6_146: U6.146 X6.5
NetU6_149: U6.149 X6.6
NetU6_154: U6.154 X13.2
NetU6_155: U6.155 X13.1
NetU6_156: U6.156 U8.28
NetU6_157: U6.157 U8.3
NetU6_160: U6.160 X4.9
NetU6_161: U6.161 X4.10
NetU6_162: U6.162 X4.11
NetU6_163: U6.163 X4.12
NetU6_164: U6.164 X4.13
NetU6_165: U6.165 X4.14
NetU6_170: U6.170 U8.31
NetU6_171: U6.171 U8.2
NetU6_172: U6.172 U8.30
NetU6_173: U6.173 U8.1
NetU6_174: U6.174 X2.8 X3.8 X6.9 X10.9
NetU6_175: U6.175 X2.9 X3.9 X6.10 X10.10
OSC1: C13.1 U6.123 XTAL1.1
OSC2: C12.2 U6.121 XTAL1.3
PGND: X1.2 X4.2 X7.3
REFGND: X8.4 X12.4
TCK: U6.81 X15.9 X15.11
TDI: U6.77 X15.3
TDO: U6.78 X15.7
TMS: U6.80 X15.1
TRSTn: R7.2 U6.79 X15.2
VP_M1: X1.1 X7.1
VP_M2: X4.1 X7.2
XRSn: U5.1 U6.124
pads on no net: U1.3 U1.4 U1.8 U1.10 U2.3 U2.4 U2.8 U2.10 U6.1 U6.2 U6.10 U6.17 U6.18 U6.19 U6.27 U6.28 U6.43 U6.46 U6.69 U6.70 U6.71 U6.73 U6.74 U6.86 U6.92 U6.98 U6.110 U6.112 U6.118 U6.119 U6.132 U6.133 U6.148 U6.166 U6.167 U6.176 X1.16 X4.16 X6.8 X9. X10.8 X11. X13. X13.4 X14. X15.6

## Polygon pours and split planes (outlines as drawn)
no net on Int1 (GND) (split plane): 70.49,0.51 0.51,0.51 0.51,44.49 70.49,44.49
no net on Int2 (PWR) (split plane): 70.49,0.51 0.51,0.51 0.51,44.49 70.49,44.49

## Silkscreen, mask and mechanical layers (free items; w line width, h text height)
Board:
  the board outline again, w1
Dimensions:
  the board outline again, w1
Fab Notes:
  drawing of 264 lines, arcs and shapes, not listed
  text "Board Layer Stack" at 103.151,112.417 h1.5
  text "Constant" at 111.442,112.417 h1.5
  text "Thickness" at 120.4,112.417 h1.5
  text "Material" at 130.431,112.417 h1.5
  text "Name" at 146.44,112.417 h1.5
  text "Layer" at 152.716,112.417 h1.5
  text "Top Overlay" at 146.44,109.417 h1.5
  text "4" at 111.442,106.417 h1.5
  text "0.025mm" at 120.4,106.417 h1.5
  text "SM-001" at 130.431,106.417 h1.5
  text "Top Solder" at 146.44,106.417 h1.5
  text "0.020mm" at 120.4,103.417 h1.5
  text "Nickel, Gold" at 130.431,103.417 h1.5
  text "Top Surface Finish" at 146.44,103.417 h1.5
  text "0.035mm" at 120.4,100.417 h1.5
  text "CF-004" at 130.431,100.417 h1.5
  text "Top Layer" at 146.44,100.417 h1.5
  text "1" at 152.716,100.417 h1.5
  text "4.3" at 111.442,97.417 h1.5
  text "0.129mm" at 120.4,97.417 h1.5
  text "PP-017" at 130.431,97.417 h1.5
  text "Dielectric 1" at 146.44,97.417 h1.5
  text "4.3" at 111.442,94.417 h1.5
  text "0.129mm" at 120.4,94.417 h1.5
  text "PP-017" at 130.431,94.417 h1.5
  text "Dielectric 2" at 146.44,94.417 h1.5
  text "0.035mm" at 120.4,91.417 h1.5
  text "CF-004" at 130.431,91.417 h1.5
  text "Int1 (GND)" at 146.44,91.417 h1.5
  text "2" at 152.717,91.417 h1.5
  text "4.8" at 111.442,88.417 h1.5
  text "0.711mm" at 120.4,88.417 h1.5
  text "Core-039" at 130.431,88.417 h1.5
  text "Dielectric 3" at 146.44,88.417 h1.5
  text "0.035mm" at 120.4,85.417 h1.5
  text "CF-004" at 130.431,85.417 h1.5
  text "Int2 (PWR)" at 146.44,85.417 h1.5
  text "3" at 152.716,85.417 h1.5
  text "4.3" at 111.442,82.417 h1.5
  text "0.129mm" at 120.4,82.417 h1.5
  text "PP-017" at 130.431,82.417 h1.5
  text "Dielectric 4" at 146.44,82.417 h1.5
  text "4.3" at 111.442,79.417 h1.5
  text "0.129mm" at 120.4,79.417 h1.5
  text "PP-017" at 130.431,79.417 h1.5
  text "Dielectric 5" at 146.44,79.417 h1.5
  text "0.035mm" at 120.4,76.417 h1.5
  text "CF-004" at 130.431,76.417 h1.5
  text "Bottom Layer" at 146.44,76.417 h1.5
  text "4" at 152.716,76.417 h1.5
  text "0.020mm" at 120.4,73.417 h1.5
  text "Nickel, Gold" at 130.431,73.417 h1.5
  text "Bottom Surface Finish" at 146.44,73.417 h1.5
  text "4" at 111.442,70.417 h1.5
  text "0.025mm" at 120.4,70.417 h1.5
  text "SM-001" at 130.431,70.417 h1.5
  text "Bottom Solder" at 146.44,70.417 h1.5
  text "Bottom Overlay" at 146.44,67.417 h1.5
  text "Configure the stack layer" at -11.6,62.6 h10
Drill Drawing:
  circle w0.254: c1705.906,1131.235 r0.921
  lines w0.2: 1703.34,1108.355 1872.733,1108.355 ; 1703.34,1133.214 1872.733,1133.214 ; 1713.982,1104.212 1713.982,1137.357 ; 1723.617,1104.212 1723.617,1137.357 ; 1741.916,1104.212 1741.916,1137.357 ; 1750.167,1104.212 1750.167,1137.357 ; 1762.179,1104.212 1762.179,1137.357 ; 1784.959,1104.212 1784.959,1137.357 ; 1794.802,1104.212 1794.802,1137.357 ; 1807.66,1104.212 1807.66,1137.357 ; 1818.959,1104.212 1818.959,1137.357 ; 1831.872,1104.212 1831.872,1137.357 ; 1851.951,1104.212 1851.951,1137.357 ; 1703.34,1104.212 1872.733,1104.212 1872.733,1137.357 1703.34,1137.357 1703.34,1104.212
  lines w0.254: 1704.985,1111.44 1706.826,1111.44 1705.906,1109.598 1704.985,1111.44 ; 1704.985,1113.741 1706.826,1113.741 1706.826,1115.583 1704.985,1115.583 1704.985,1113.741 ; 1704.985,1117.885 1705.906,1118.345 1706.826,1117.885 1706.366,1118.805 1706.826,1119.726 1705.906,1119.266 1704.985,1119.726 1705.445,1118.805 1704.985,1117.885 ; 1704.985,1122.488 1705.445,1122.488 1705.906,1122.028 1706.366,1122.488 1706.826,1122.488 1706.366,1122.948 1706.826,1123.409 1706.366,1123.409 1705.906,1123.869 1705.445,1123.409 1704.985,1123.409 1705.445,1122.948 1704.985,1122.488 ; 1704.985,1126.631 1705.445,1126.631 1705.445,1126.171 1706.366,1126.171 1706.366,1126.631 1706.826,1126.631 1706.826,1127.552 1706.366,1127.552 1706.366,1128.012 1705.445,1128.012 1705.445,1127.552 1704.985,1127.552 1704.985,1126.631
  text "Symbol" at 1705.826,1134.457 h2.4
  text "Count" at 1715.225,1134.457 h2.4
  text "Hole Size" at 1724.86,1134.457 h2.4
  text "Plated" at 1743.159,1134.457 h2.4
  text "Hole Type" at 1751.41,1134.457 h2.4
  text "Drill Layer Pair" at 1763.422,1134.457 h2.4
  text "Via/Pad" at 1786.202,1134.457 h2.4
  text "Pad Shape" at 1796.045,1134.457 h2.4
  text "Template" at 1808.902,1134.457 h2.4
  text "Description" at 1820.202,1134.457 h2.4
  text "Hole Tolerance (+)" at 1833.115,1134.457 h2.4
  text "Hole Tolerance (-)" at 1853.194,1134.457 h2.4
  text "2" at 1715.225,1130.314 h2
  text "1.300mm (51.18mil)" at 1724.86,1130.314 h2
  text "PTH" at 1743.159,1130.314 h2
  text "Round" at 1751.41,1130.314 h2
  text "Top Layer - Bottom Layer" at 1763.422,1130.314 h2
  text "Pad" at 1786.202,1130.314 h2
  text "Rounded" at 1796.045,1130.314 h2
  text "c195h130" at 1808.902,1130.314 h2
  text "4" at 1715.225,1126.171 h2
  text "1.550mm (61.02mil)" at 1724.86,1126.171 h2
  text "NPTH" at 1743.159,1126.171 h2
  text "Round" at 1751.41,1126.171 h2
  text "Top Layer - Bottom Layer" at 1763.422,1126.171 h2
  text "Pad" at 1786.202,1126.171 h2
  text "Rounded" at 1796.045,1126.171 h2
  text "c155hn155" at 1808.902,1126.171 h2
  text "8" at 1715.225,1122.028 h2
  text "2.400mm (94.49mil)" at 1724.86,1122.028 h2
  text "PTH" at 1743.159,1122.028 h2
  text "Round" at 1751.41,1122.028 h2
  text "Top Layer - Bottom Layer" at 1763.422,1122.028 h2
  text "Pad" at 1786.202,1122.028 h2
  text "Rounded" at 1796.045,1122.028 h2
  text "c320h240" at 1808.902,1122.028 h2
  text "16" at 1715.225,1117.885 h2
  text "0.850mm (33.47mil)" at 1724.86,1117.885 h2
  text "PTH" at 1743.159,1117.885 h2
  text "Round" at 1751.41,1117.885 h2
  text "Top Layer - Bottom Layer" at 1763.422,1117.885 h2
  text "Pad" at 1786.202,1117.885 h2
  text "(Mixed)" at 1796.045,1117.885 h2
  text "(Mixed)" at 1808.902,1117.885 h2
  text "23" at 1715.225,1113.741 h2
  text "0.800mm (31.50mil)" at 1724.86,1113.741 h2
  text "PTH" at 1743.159,1113.741 h2
  text "Round" at 1751.41,1113.741 h2
  text "Top Layer - Bottom Layer" at 1763.422,1113.741 h2
  text "Pad" at 1786.202,1113.741 h2
  text "(Mixed)" at 1796.045,1113.741 h2
  text "(Mixed)" at 1808.902,1113.741 h2
  text "49" at 1715.225,1109.598 h2
  text "0.200mm (7.87mil)" at 1724.86,1109.598 h2
  text "PTH" at 1743.159,1109.598 h2
  text "Round" at 1751.41,1109.598 h2
  text "Top Layer - Bottom Layer" at 1763.422,1109.598 h2
  text "Via" at 1786.202,1109.598 h2
  text "Rounded" at 1796.045,1109.598 h2
  text "v50h20" at 1808.902,1109.598 h2
  text "102 Total" at 1715.225,1105.455 h2

## Dimensions
0,0 to 71,0 on Dimensions
0,0 to 0,45 on Dimensions

## Text inside footprints (layer, text, board x,y; h text height)
U1: Bottom External CAD "0.122in/3.099mm" at 126.861,26.518 h0.64 r180; Bottom External CAD "0.102in/2.591mm" at 121.094,30.32 h0.64 r180; Bottom External CAD "0.02in/0.5mm" at 121.57,22.923 h0.64 r180; Bottom External CAD "0.016in/0.4mm" at 116.324,26.017 h0.64 r180; Bottom External CAD "Alt 2 Padstyle: OX90Y60D30P" at 114.903,40.706 h1.27 r180; Bottom External CAD "Alt 1 Padstyle: RX20Y10D0T" at 115.22,39.182 h1.27 r180; Bottom External CAD "Default Padstyle: RX28Y8D0T" at 114.903,34.61 h1.27 r180; Bottom External CAD "Pin 1 Padstyle: RX41Y8D0T" at 115.538,33.086 h1.27 r180
U2: Bottom External CAD "Pin 1 Padstyle: RX41Y8D0T" at 115.828,22.153 h1.27 r180; Bottom External CAD "Default Padstyle: RX28Y8D0T" at 115.193,23.677 h1.27 r180; Bottom External CAD "Alt 1 Padstyle: RX20Y10D0T" at 115.51,28.249 h1.27 r180; Bottom External CAD "Alt 2 Padstyle: OX90Y60D30P" at 115.193,29.773 h1.27 r180; Bottom External CAD "0.016in/0.4mm" at 116.615,15.085 h0.64 r180; Bottom External CAD "0.02in/0.5mm" at 121.86,11.991 h0.64 r180; Bottom External CAD "0.102in/2.591mm" at 121.384,19.388 h0.64 r180; Bottom External CAD "0.122in/3.099mm" at 127.151,15.585 h0.64 r180
X1: Top Overlay "1" at 18.735,38.85 h1.02; Top Overlay "2" at 18.396,42.75 h1.02; Top Overlay "15" at 29.855,38.85 h1.02; Top Overlay "16" at 29.855,42.75 h1.02
X2: Top Overlay "10" at 10.2,7.805 h1.02 r90; Top Overlay "9" at 14.1,7.805 h1.02 r90; Top Overlay "1" at 14.1,0.495 h1.02 r90; Top Overlay "2" at 10.2,0.156 h1.02 r90
X3: Top Overlay "2" at 46.2,0.156 h1.02 r90; Top Overlay "1" at 50.1,0.495 h1.02 r90; Top Overlay "9" at 50.1,7.805 h1.02 r90; Top Overlay "10" at 46.2,7.805 h1.02 r90
X4: Top Overlay "16" at 65.865,42.75 h1.02; Top Overlay "15" at 65.865,38.85 h1.02; Top Overlay "2" at 54.406,42.75 h1.02; Top Overlay "1" at 54.745,38.85 h1.02
X6: Bottom Overlay "14" at 7.225,5.1 h1.02; Bottom Overlay "13" at 7.225,1.2 h1.02; Bottom Overlay "2" at 17.414,5.1 h1.02; Bottom Overlay "1" at 17.075,1.2 h1.02
X7: Bottom Overlay "5" at 128.2,34.95 h1.02 r90; Bottom Overlay "1" at 128.3,42.9 h1.02 r90
X8: Bottom Overlay "1" at 3.4,5.7 h1.02 r270; Bottom Overlay "5" at 3.5,13.65 h1.02 r270
X10: Bottom Overlay "14" at 32.225,5.1 h1.02; Bottom Overlay "13" at 32.225,1.2 h1.02; Bottom Overlay "2" at 42.414,5.1 h1.02; Bottom Overlay "1" at 42.075,1.2 h1.02
X12: Bottom Overlay "1" at 28.4,5.7 h1.02 r270; Bottom Overlay "5" at 28.5,13.65 h1.02 r270
X15: Top Overlay "14" at 160.398,4.024 h1.02 r270; Top Overlay "13" at 156.498,4.024 h1.02 r270; Top Overlay "2" at 160.398,14.213 h1.02 r270; Top Overlay "1" at 156.498,13.874 h1.02 r270